# EAGLE board caphumidsens_rev3 (EAGLE 6.3)
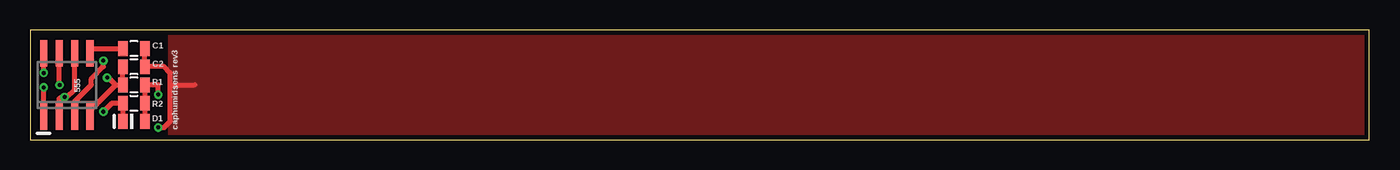
[diagram p0: board, top side]
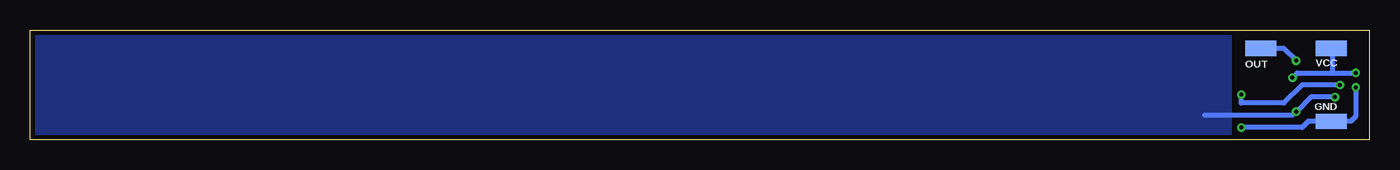
[diagram p1: board, bottom side, seen from below]

Size 110 x 9 mm. Coordinates in mm from the lower left corner, seen from the top.
Outline: 0,0 110,0 110,9 0,9 0,0
Copper layers (1*16): Top 0.0356mm / dielectric 1.5011mm / Bottom 0.0356mm
Design rules "oshpark_rules": minimum track width 6mil, minimum drill 13mil, track to track 6mil, track to pad 6mil, pad to pad 6mil, via to via 6mil, smd to smd 6mil, copper to edge 15mil, drill to drill 6mil, minimum pad ring 7mil, minimum via ring 7mil, stop-mask expansion 4mil, vias tented up to drill 0mil, thermal gap 10mil

## Footprints (pad centres in the part's own frame; a part is rotated, then mirrored left to right if it is on the bottom)
0805 = smd 0.8 x 1.2: 1 -0.9,0; 2 0.9,0
DIODE_0805 = smd 0.8 x 1.2: 1 -0.9,0; 2 0.9,0
SMD1,27-2,54 = smd 1.27 x 2.54: 1 0,0
SO08 = smd 0.6 x 2.2: 1 -1.905,-2.6; 2 -0.635,-2.6; 3 0.635,-2.6; 4 1.905,-2.6; 5 1.905,2.6; 6 0.635,2.6; 7 -0.635,2.6; 8 -1.905,2.6

## Placement (x,y rotation side)
C1  [0805]  8.5,7.5 180 top
C2  [0805]  8.5,6 180 top
D1  DIODE_0805  [DIODE_0805]  8.5,1.5 0 top
GND  WIREPADSMD2,54-5,08  [SMD1,27-2,54]  3.1,1.5 90 bottom
IC1  555  [SO08]  3,4.5 0 top
OUT  WIREPADSMD2,54-5,08  [SMD1,27-2,54]  8.9,7.5 90 bottom
R1  [0805]  8.5,4.5 180 top
R2  [0805]  8.5,3 0 top
VCC  WIREPADSMD2,54-5,08  [SMD1,27-2,54]  3.1,7.5 90 bottom

## Library data of the parts
C1 C2 R1 R2 = SparkFun
D1 = seb
GND OUT VCC = wirepad
IC1 = linear

## Nets
CAP+: D1.1 IC1.2 IC1.6 R2.1
GND: C1.1 C2.1 GND.1 IC1.1
N$1: D1.2 IC1.7 R1.1 R2.2
N$3: C1.2 IC1.5
N$4: IC1.3 OUT.1
VCC: C2.2 IC1.4 IC1.8 R1.2 VCC.1

## Tracks (layer width: path | path; a pad name or v marks a point on that pad's centre or on a via)
CAP+  (via drill 0.33 pad 0.18)
  Top 0.406: IC1.2 2.37,3.37 2.5,3.5 v2.8,3.5 3,3.5 3.63,4.13 IC1.6 | v6,2.3 6.7,3 R2.1 D1.1
  Bottom 0.406: 13.5,2 6.3,2 v6,2.3 4.8,3.5 v2.8,3.5
  pour Bottom: 11.5,9 11.5,0 110,0 110,9
GND  (via drill 0.33 pad 0.18)
  Top 0.406: C1.1 C2.1 11,6 11.5,5.5 11.5,4.5 | 11.5,4.5 13.5,4.5 | 11.5,4.5 11.5,1.5 11,1 v10.5,1 | IC1.1 v1.09,4.3
  Bottom 0.406: v10.5,1 5.5,1 5,1.5 GND.1 1.5,1.5 IC1.1 v1.09,4.3
  pour Top: 11.5,9 11.5,0 110,0 110,9
N$1  (via drill 0.33 pad 0.18)
  Top 0.406: D1.2 R2.2 R1.1 10.5,4.5 v10.5,3.7 | IC1.7 2.37,4.54 v2.4,4.5
  Bottom 0.406: v10.5,3.7 10.5,3 7,3 5.5,4.5 v2.4,4.5
N$3
  Top 0.406: C1.2 4.91,7.5 IC1.5
N$4  (via drill 0.33 pad 0.18)
  Top 0.406: IC1.3 3.63,3.13 5,4.5 5,5 6,6 v6,6.5
  Bottom 0.406: v6,6.5 7,7.5 OUT.1
VCC  (via drill 0.33 pad 0.18)
  Top 0.406: C2.2 R1.2 7,4.5 | 5,2 IC1.4 4.91,2.4 7,4.5 | v1.09,5.5 IC1.8 | v6.3,5.1 6.4,5.1 7,4.5
  Bottom 0.406: 3,5.5 v1.09,5.5 | VCC.1 3,7.4 3,5.5 | 3,5.5 5.9,5.5 v6.3,5.1

## Text on the board
tNames: C1 | C2 | 555 | R1 | R2 | D1 | caphumidsens rev3